# Altium PCB IR_PAIR.PcbDoc
Units mm, origin at the board's own origin, x right, y up, seen from the top; angles counter-clockwise.
Board outline 99.95 x 99.95 mm, 2 copper layers (Top Layer, Bottom Layer); 30 components, 28 nets, 132 pads, 0 vias.
Unrouted connection lines stored in the file: 80.
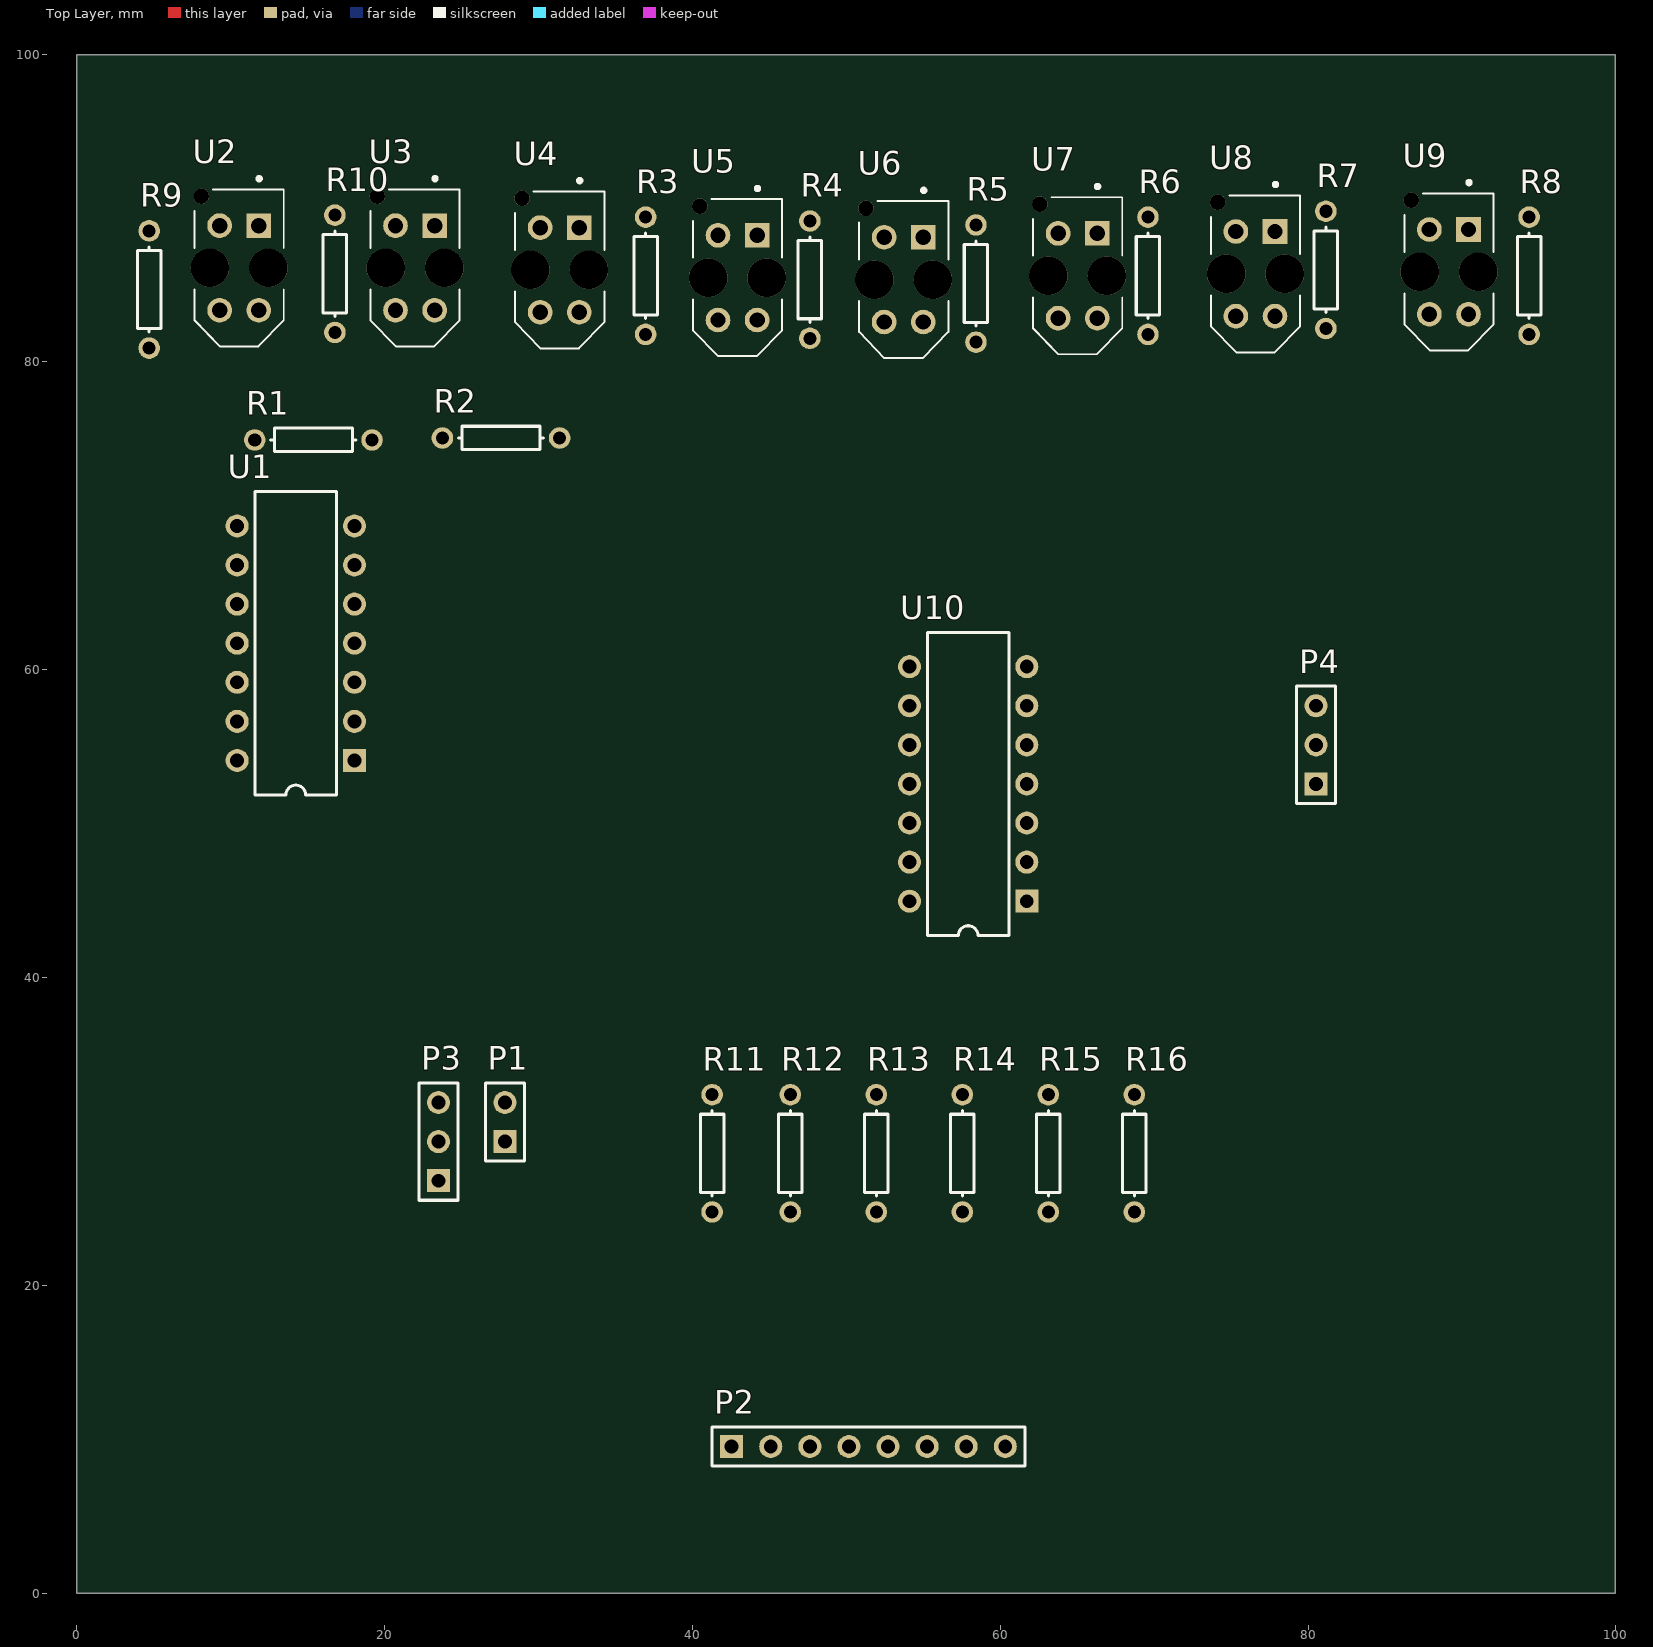
[diagram p0: Top Layer view]
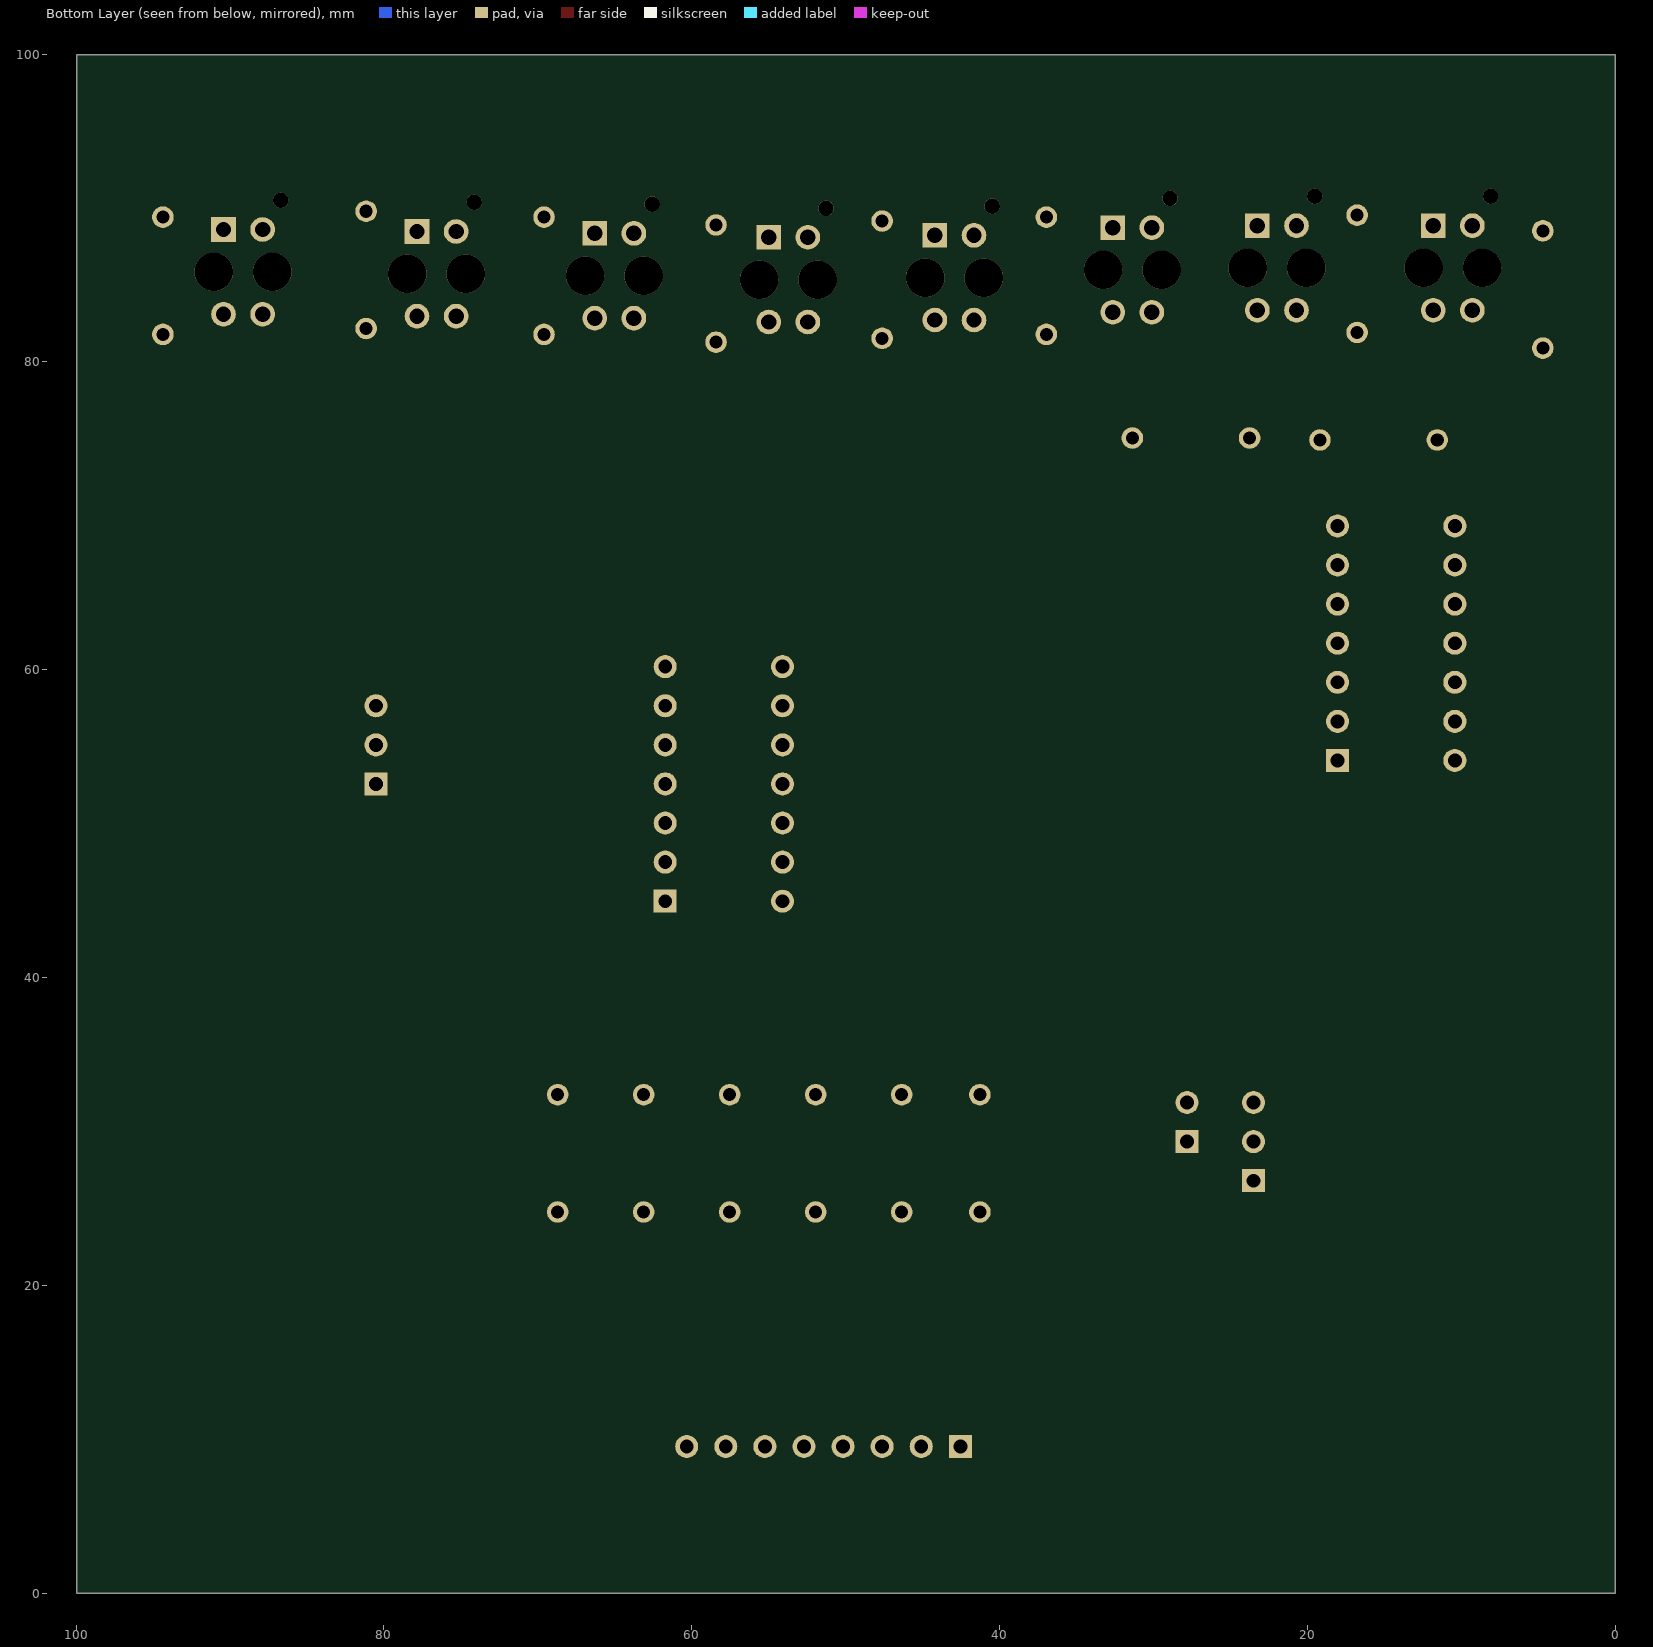
[diagram p1: Bottom Layer view, seen from below]

## Layer stack, top to bottom
Top Solder: solder mask 0.0102, Solder Resist, Dk 3.5
Top Layer: signal copper 0.0356
Dielectric 1: dielectric 0.32, FR-4, Dk 4.8
Bottom Layer: signal copper 0.0356
Bottom Solder: solder mask 0.0102, Solder Resist, Dk 3.5

## Board outline
0,0 99.949,0 99.949,99.949 0,99.949

## Design rules (kind name [scope] priority, off if disabled: settings)
Clearance [All] p1: gap=0.254
PolygonConnect [All] p1: connectstyle=Relief reliefconductorwidth=0.254 reliefentries=4 polygonreliefangle="90 Angle" airgapwidth=0.254
RoutingVias [All] p1: holewidth=0.711 width=1.27 viastyle="Through Hole" minholewidth=0.711 minwidth=1.27 maxholewidth=0.711 maxwidth=1.27
SolderMaskExpansion [All] p1: expansion=0.102
Width [All] p1: maxlimit=0.254 minlimit=0.254 preferedwidth=0.254
30 further rules are at their usual default settings.

## Components (designator, comment, footprint, x,y, rotation, side; value= is the part's Value field where it differs from the comment)
P1 "Header 2" HDR1X2 27.813,29.337 r90 top
P2 "Header 8" HDR1X8 42.545,9.525 r0 top
P3 "Header 3" HDR1X3 23.495,26.797 r90 top
P4 "Header 3" HDR1X3 80.518,52.578 r90 top
R1 "Res1" AXIAL-0.3 15.367,74.93 r0 top
R2 "Res1" AXIAL-0.3 27.559,75.057 r0 top
R3 "Res1" AXIAL-0.3 36.957,85.598 r90 top
R4 "Res1" AXIAL-0.3 47.625,85.344 r90 top
R5 "Res1" AXIAL-0.3 58.42,85.09 r90 top
R6 "Res1" AXIAL-0.3 69.596,85.598 r90 top
R7 "Res1" AXIAL-0.3 81.153,85.979 r90 top
R8 "Res1" AXIAL-0.3 94.361,85.598 r90 top
R9 "Res1" AXIAL-0.3 4.699,84.709 r90 top
R10 "Res1" AXIAL-0.3 16.764,85.725 r90 top
R11 "Res1" AXIAL-0.3 41.275,28.575 r90 top
R12 "Res1" AXIAL-0.3 46.355,28.575 r90 top
R13 "Res1" AXIAL-0.3 51.943,28.575 r90 top
R14 "Res1" AXIAL-0.3 57.531,28.575 r90 top
R15 "Res1" AXIAL-0.3 63.119,28.575 r90 top
R16 "Res1" AXIAL-0.3 68.707,28.575 r90 top
U1 "LM324AN" N014 14.224,61.722 r90 top
U2 "TCRT5000L" XDCR_TCRT5000L 10.541,86.106 r270 top
U3 "TCRT5000L" XDCR_TCRT5000L 21.971,86.106 r270 top
U4 "TCRT5000L" XDCR_TCRT5000L 31.369,85.979 r270 top
U5 "TCRT5000L" XDCR_TCRT5000L 42.926,85.471 r270 top
U6 "TCRT5000L" XDCR_TCRT5000L 53.721,85.344 r270 top
U7 "TCRT5000L" XDCR_TCRT5000L 65.024,85.598 r270 top
U8 "TCRT5000L" XDCR_TCRT5000L 76.581,85.725 r270 top
U9 "TCRT5000L" XDCR_TCRT5000L 89.154,85.852 r270 top
U10 "LM324AN" N014 57.912,52.578 r90 top

## Footprints (in the part's own frame and the unit in brackets; to place one, negate y for a bottom-side part, rotate by r counter-clockwise, add the part's x,y. Pads: shape width x height; smd on the part's side, far side on the other; paste and mask are expansions set on the pad)
AXIAL-0.3 [mm] "Axial Device, Thru-Hole; 2 Leads; 0.3 in Pin Spacing"
  round 1.4 hole 0.85: 1(-3.81,0) 2(3.81,0)
  silkscreen extent -2.77,-0.76 2.77,0.76
HDR1X2 [mm] "Connector; Header; 2 Position"
  rect 1.5x1.5 hole 0.9: 1(0,0)
  round 1.5 hole 0.9: 2(2.54,0)
  silkscreen extent -1.27,-1.27 3.81,1.27
HDR1X3 [mm] "Connector; Header; 3 Position"
  rect 1.5x1.5 hole 0.9: 1(0,0)
  round 1.5 hole 0.9: 2(2.54,0) 3(5.08,0)
  silkscreen extent -1.27,-1.27 6.35,1.27
HDR1X8 [mm] "Connector; Header; 8 Position"
  rect 1.5x1.5 hole 0.9: 1(0,0)
  round 1.5 hole 0.9: 2(2.54,0) 3(5.08,0) 4(7.62,0) 5(10.16,0) 6(12.7,0) 7(15.24,0) 8(17.78,0)
  silkscreen extent -1.27,-1.27 19.05,1.27
N014 [mm] "DIP; 14 Leads; Row Spacing 7.62 mm; Pitch 2.54 mm"
  rect 1.5x1.5 hole 0.9: 1(-7.62,-3.81)
  round 1.5 hole 0.9: 2(-5.08,-3.81) 3(-2.54,-3.81) 4(0,-3.81) 5(2.54,-3.81) 6(5.08,-3.81) 7(7.62,-3.81) 8(7.62,3.81) 9(5.08,3.81) 10(2.54,3.81) 11(0,3.81) 12(-2.54,3.81) 13(-5.08,3.81) 14(-7.62,3.81)
  silkscreen extent -9.85,-2.65 9.85,2.65
XDCR_TCRT5000L [mm]
  rect 1.6x1.6 hole 1: 1(-2.75,1.27)
  round 1.6 hole 1: 2(-2.75,-1.27) 3(2.75,-1.27) 4(2.75,1.27)
  round 1 hole 1 unplated: None(-4.65,-2.45)
  round 2.5 hole 2.5 unplated: None(0,1.9) None(0,-1.9)
  silkscreen extent -5.92,-2.9 5.1,2.9

## Part data
P1: "Header, 2-Pin"
P2: "Header, 8-Pin"
P3 P4: "Header, 3-Pin"
R1 R2 R3 R4 R5 R6 R7 R8 R9 R10 R11 R12 R13 R14 R15 R16: "Resistor"
U1 U10: "Quadruple Operational Amplifier"
U2 U3 U4 U5 U6 U7 U8 U9: "TCRT5000 Series 940 nm 100 mA 60 mA Transistor Output Reflective Optical Sensor"

## Nets (pads, with @x,y where several pads share a name; then routed paths per layer and width w, separated by ;. In a path a pad name is that pad's centre, name@x,y a point inside that pad or via, vN(x,y) a via of type N, cw(c..) or ccw(c..) an arc to the next point about the centre after c; other vN are vias at no path point)
GND: P1.2 P3.3 P4.3 R9.1 R10.1 R11.1 R12.1 R13.1 R14.1 R15.1 R16.1 U1.11 U2.3 U3.3 U4.3 U5.3 U6.3 U7.3 U8.3 U9.3 U10.11
NetR1_1: R1.1 U2.4
NetR2_1: R2.1 U3.4
NetR3_1: R3.1 U4.4
NetR4_1: R4.1 U5.4
NetR5_1: R5.1 U6.4
NetR6_1: R6.1 U7.4
NetR7_1: R7.1 U8.4
NetR8_1: R8.1 U9.4
OP1: R9.2 U1.3 U2.2
OP2: R10.2 U1.5 U3.2
OP3: R11.2 U1.10 U4.2
OP4: R12.2 U1.12 U5.2
OP5: R13.2 U6.2 U10.3
OP6: R14.2 U7.2 U10.5
OP7: R15.2 U8.2 U10.10
OP8: R16.2 U9.2 U10.12
OT1: P2.1 U1.1
OT2: P2.2 U1.7
OT3: P2.3 U1.8
OT4: P2.4 U1.14
OT5: P2.5 U10.1
OT6: P2.6 U10.7
OT7: P2.7 U10.8
OT8: P2.8 U10.14
POT1: P3.2 U1.2 U1.6 U1.9 U1.13
POT2: P4.2 U10.2 U10.6 U10.9 U10.13
VCC: P1.1 P3.1 P4.1 R1.2 R2.2 R3.2 R4.2 R5.2 R6.2 R7.2 R8.2 U1.4 U2.1 U3.1 U4.1 U5.1 U6.1 U7.1 U8.1 U9.1 U10.4
pads on no net: U2.None U3.None U4.None U5.None U6.None U7.None U8.None U9.None